# Altium PCB LED_Driver_48.PcbDoc
Units mm, origin at the board's own origin, x right, y up, seen from the top; angles counter-clockwise.
Board outline 96.65 x 50.67 mm, 2 copper layers (Top Layer, Bottom Layer); 60 components, 67 nets, 266 pads, 43 vias.
Unrouted connection lines stored in the file: 3.
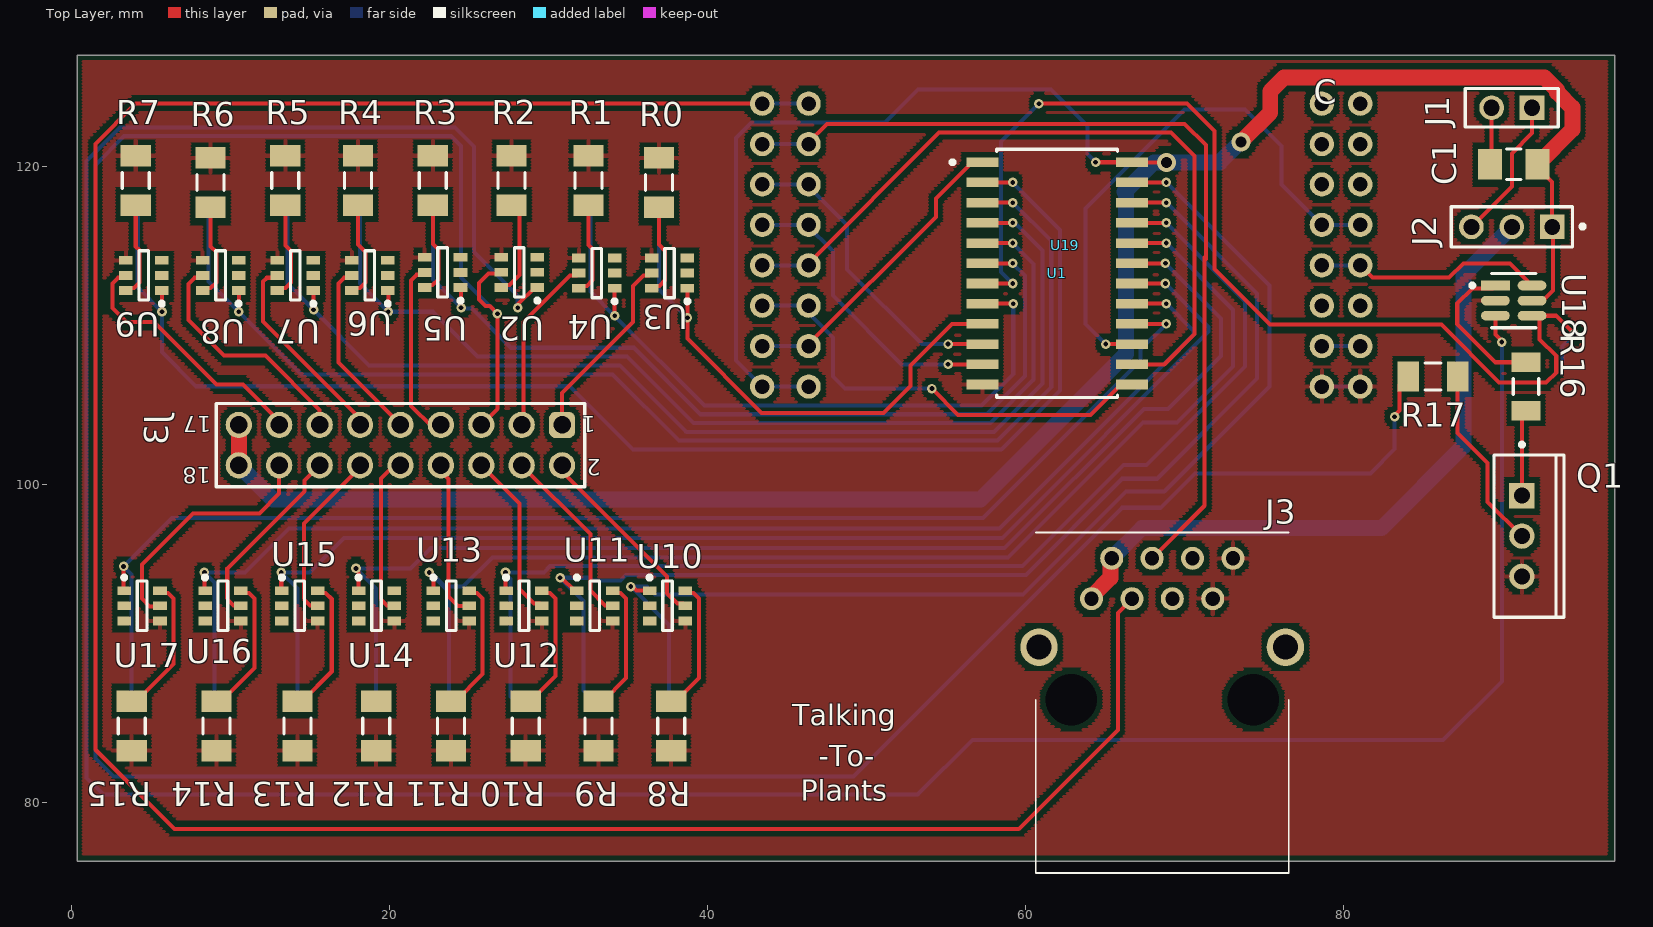
[diagram p0: Top Layer view]
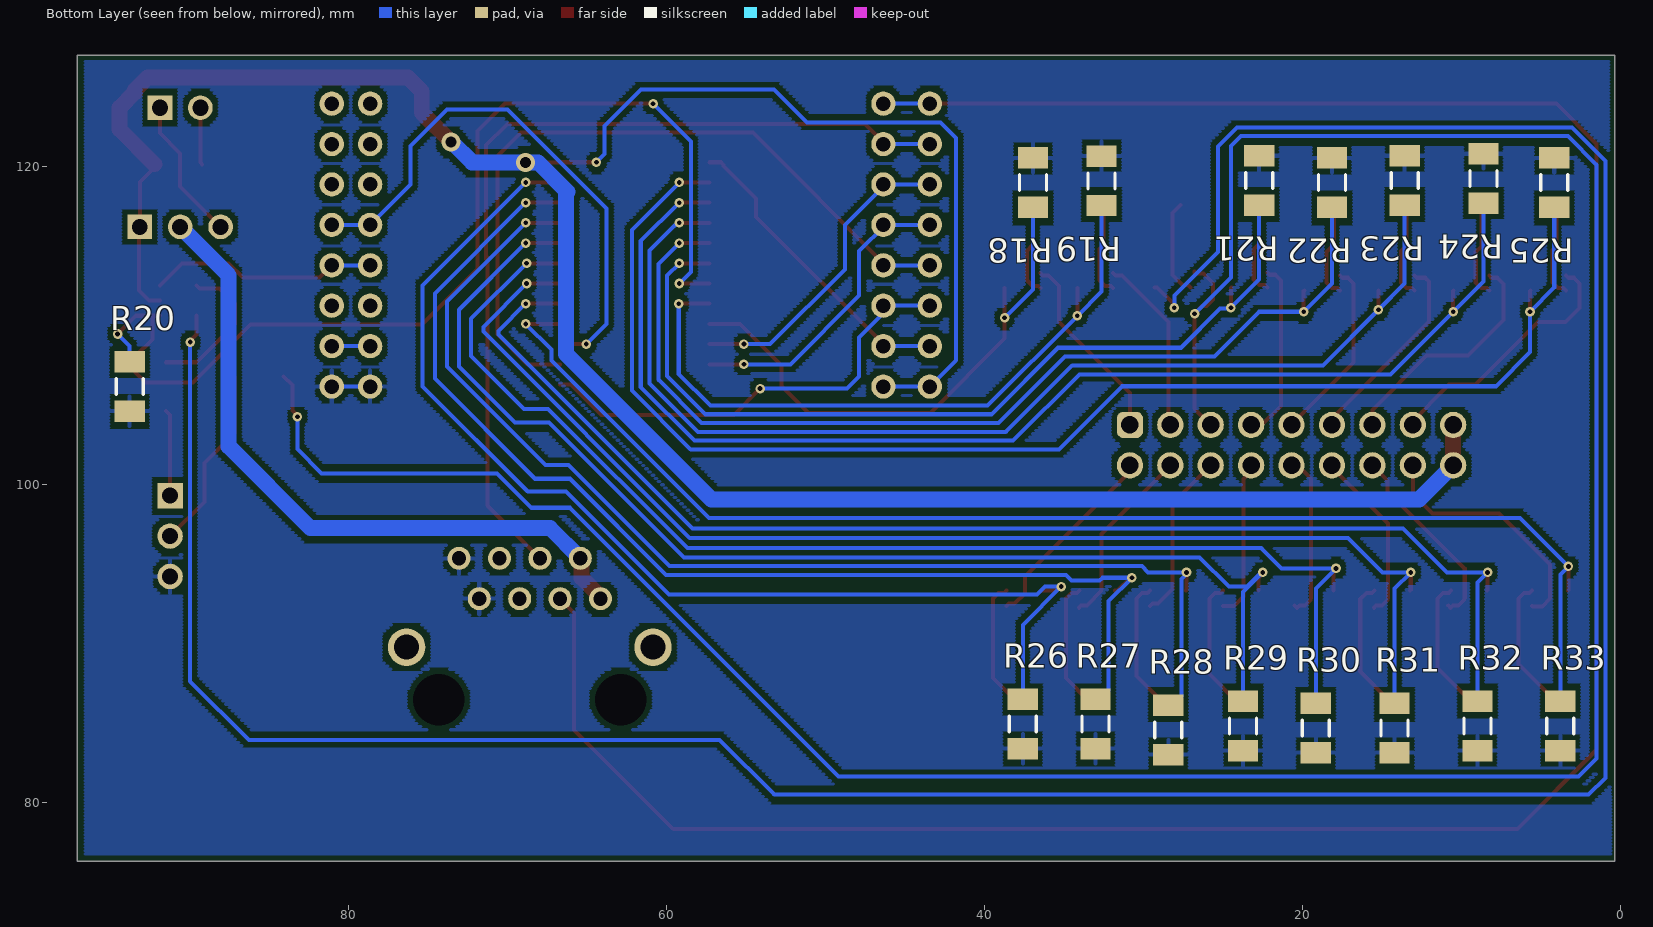
[diagram p1: Bottom Layer view, seen from below]

## Layer stack, top to bottom
Top Solder: solder mask 0.0102, Solder Resist, Dk 3.5
Top Layer: signal copper 0.0356
Dielectric 1: dielectric 0.32, FR-4, Dk 4.8
Bottom Layer: signal copper 0.0356
Bottom Solder: solder mask 0.0102, Solder Resist, Dk 3.5

## Board outline
0.381,76.327 97.028,76.327 97.028,127 0.381,127

## Design rules (kind name [scope] priority, off if disabled: settings)
Clearance [All] p1: gap=0.3 ignorepadtopadclearanceinfootprint=FALSE
ComponentClearance [All] p1: gap=0.254 collisioncheckmode=3 verticalgap=0 showdistances=FALSE donotcheckwithout3dbody=TRUE
PolygonConnect [All] p1: connectstyle=Relief reliefconductorwidth=0.254 reliefentries=4 polygonreliefangle="90 Angle" airgapwidth=0.254
RoutingVias [All] p1: holewidth=0.711 width=1.27 viastyle="Through Hole" minholewidth=0.711 minwidth=1.27 maxholewidth=0.711 maxwidth=1.27
SolderMaskExpansion [All] p1: expansion=0.102 istentingtop=FALSE
Width [All] p1: maxlimit=1 minlimit=0.254 preferedwidth=0.254
29 further rules are at their usual default settings.

## Components (designator, comment, footprint, x,y, rotation, side; value= is the part's Value field where it differs from the comment)
C "OpenMV H7 Headers" "OPENMV H7" 62.738,115.062 r0 top
C1 "1206YC105KAT2A" FP-1206-L_3_2_0_2-W_1_6_0-IPC_A 90.678,120.142 r180 top
J1 "SSQ-102-01-G-S" SMTC-SSQ-102-01-X-S 91.821,123.698 r180 top
J2 "90120-0763" FP-90120-0763-MFG 90.551,116.205 r180 top
J3 "MTC-8810SB" MTC8810SB 64.135,92.837 r0 top
J3 "61301821121" 61301821121 20.701,102.489 r180 top
Q1 "SPP20N60C3" INF-PG-TO220-3-1 91.186,96.774 r0 top
R0 "15R 5% 1206(3216)" RESC1206(3216)_M 36.957,118.999 r90 top value="15.00 Ohm"
R1 "15R 5% 1206(3216)" RESC1206(3216)_M 32.512,119.126 r90 top value="15.00 Ohm"
R2 "15R 5% 1206(3216)" RESC1206(3216)_M 27.686,119.126 r90 top value="15.00 Ohm"
R3 "15R 5% 1206(3216)" RESC1206(3216)_M 22.733,119.126 r90 top value="15.00 Ohm"
R4 "15R 5% 1206(3216)" RESC1206(3216)_M 18.034,119.126 r90 top value="15.00 Ohm"
R5 "15R 5% 1206(3216)" RESC1206(3216)_M 13.462,119.126 r90 top value="15.00 Ohm"
R6 "15R 5% 1206(3216)" RESC1206(3216)_M 8.763,118.999 r90 top value="15.00 Ohm"
R7 "15R 5% 1206(3216)" RESC1206(3216)_M 4.064,119.126 r90 top value="15.00 Ohm"
R8 "15R 5% 1206(3216)" RESC1206(3216)_M 37.719,84.836 r270 top value="15.00 Ohm"
R9 "15R 5% 1206(3216)" RESC1206(3216)_M 33.147,84.836 r270 top value="15.00 Ohm"
R10 "15R 5% 1206(3216)" RESC1206(3216)_M 28.575,84.836 r270 top value="15.00 Ohm"
R11 "15R 5% 1206(3216)" RESC1206(3216)_M 23.876,84.836 r270 top value="15.00 Ohm"
R12 "15R 5% 1206(3216)" RESC1206(3216)_M 19.177,84.836 r270 top value="15.00 Ohm"
R13 "15R 5% 1206(3216)" RESC1206(3216)_M 14.224,84.836 r270 top value="15.00 Ohm"
R14 "15R 5% 1206(3216)" RESC1206(3216)_M 9.144,84.836 r270 top value="15.00 Ohm"
R15 "15R 5% 1206(3216)" RESC1206(3216)_M 3.81,84.836 r270 top value="15.00 Ohm"
R16 "RC1206FR-07100RL" RESC3116X65X40ML10T20 91.44,106.172 r270 top
R17 "18R 1% 1206(3216)" RESC1206(3216)_M 85.598,106.807 r0 top value="18.00 Ohm"
R18 "18R 1% 1206(3216)" RESC1206(3216)_M 36.957,118.999 r270 bottom value="18.00 Ohm"
R19 "18R 1% 1206(3216)" RESC1206(3216)_M 32.639,119.1 r270 bottom value="18.00 Ohm"
R20 "18R 1% 1206(3216)" RESC1206(3216)_M 93.726,106.172 r90 bottom value="18.00 Ohm"
R21 "18R 1% 1206(3216)" RESC1206(3216)_M 22.733,119.126 r270 bottom value="18.00 Ohm"
R22 "18R 1% 1206(3216)" RESC1206(3216)_M 18.161,118.999 r270 bottom value="18.00 Ohm"
R23 "18R 1% 1206(3216)" RESC1206(3216)_M 13.589,119.126 r270 bottom value="18.00 Ohm"
R24 "18R 1% 1206(3216)" RESC1206(3216)_M 8.636,119.253 r270 bottom value="18.00 Ohm"
R25 "18R 1% 1206(3216)" RESC1206(3216)_M 4.191,118.999 r270 bottom value="18.00 Ohm"
R26 "18R 1% 1206(3216)" RESC1206(3216)_M 37.592,84.963 r90 bottom value="18.00 Ohm"
R27 "18R 1% 1206(3216)" RESC1206(3216)_M 33.02,84.963 r90 bottom value="18.00 Ohm"
R28 "18R 1% 1206(3216)" RESC1206(3216)_M 28.448,84.582 r90 bottom value="18.00 Ohm"
R29 "18R 1% 1206(3216)" RESC1206(3216)_M 23.749,84.836 r90 bottom value="18.00 Ohm"
R30 "18R 1% 1206(3216)" RESC1206(3216)_M 19.177,84.709 r90 bottom value="18.00 Ohm"
R31 "18R 1% 1206(3216)" RESC1206(3216)_M 14.224,84.709 r90 bottom value="18.00 Ohm"
R32 "18R 1% 1206(3216)" RESC1206(3216)_M 9.017,84.836 r90 bottom value="18.00 Ohm"
R33 "18R 1% 1206(3216)" RESC1206(3216)_M 3.81,84.836 r90 bottom value="18.00 Ohm"
U1 "CD74HC4067M96" FP-DW0024A-MFG 61.975,113.284 r0 top
U2 "BCR420U" INF-SC74_N 28.176,113.35 r180 top
U3 "BCR420U" INF-SC74_N 37.611,113.304 r180 top
U4 "BCR420U" INF-SC74_N 33.039,113.304 r180 top
U5 "BCR420U" INF-SC74_N 23.35,113.345 r180 top
U6 "BCR420U" INF-SC74_N 18.778,113.157 r180 top
U7 "BCR420U" INF-SC74_N 14.097,113.157 r180 top
U8 "BCR420U" INF-SC74_N 9.398,113.157 r180 top
U9 "BCR420U" INF-SC74_N 4.572,113.157 r180 top
U10 "BCR420U" INF-SC74_N 37.483,92.39 r0 top
U11 "BCR420U" INF-SC74_N 32.911,92.39 r0 top
U12 "BCR420U" INF-SC74_N 28.466,92.39 r0 top
U13 "BCR420U" INF-SC74_N 23.894,92.39 r0 top
U14 "BCR420U" INF-SC74_N 19.195,92.39 r0 top
U15 "BCR420U" INF-SC74_N 14.369,92.39 r0 top
U16 "BCR420U" INF-SC74_N 9.543,92.39 r0 top
U17 "BCR420U" INF-SC74_N 4.463,92.39 r0 top
U18 "SN74LVC1G3157DBVR" FP-DBV0006A-IPC_A 90.671,111.572 r0 top
U19 "OpenMV_M7 (Shield)" OPENMV_M7(32.48MM) 78.613,123.952 r0 top (schematic designator U1)

## Footprints (in the part's own frame and the unit in brackets; to place one, negate y for a bottom-side part, rotate by r counter-clockwise, add the part's x,y. Pads: shape width x height; smd on the part's side, far side on the other; paste and mask are expansions set on the pad)
61301821121 [mm] "Pin Header, pitch 2.54 mm, THT, Vertical, dual row, 18p"
  rrect50% 1.65x1.65 hole 1.1: 1(-10.16,-1.27)
  round 1.65 hole 1.1: 2(-10.16,1.27) 3(-7.62,-1.27) 4(-7.62,1.27) 5(-5.08,-1.27) 6(-5.08,1.27) 7(-2.54,-1.27) 8(-2.54,1.27) 9(0,-1.27) 10(0,1.27) 11(2.54,-1.27) 12(2.54,1.27) 13(5.08,-1.27) 14(5.08,1.27) 15(7.62,-1.27) 16(7.62,1.27) 17(10.16,-1.27) 18(10.16,1.27)
  silkscreen extent -11.58,-2.62 11.58,2.62, body extent -11.43,-2.54 11.43,2.54, height 8.59
FP-1206-L_3_2_0_2-W_1_6_0-IPC_A [mm]
  rect 1.505x1.906 smd paste+0 mask+0: 1(-1.501,0) 2(1.501,0)
  silkscreen extent -0.45,-0.95 0.45,0.95, body extent -2.75,-1.45 2.75,1.45, height 0.25
FP-90120-0763-MFG [mm]
  rect 1.55x1.55 hole 1 paste-1000 mask+0: 1(-2.54,0)
  round 1.55 hole 1 paste-1000 mask+0: 2(0,0) 3(2.54,0)
  silkscreen extent -4.57,-1.27 3.81,1.27, body extent -3.91,-1.37 3.91,1.37, height 0.25
FP-DBV0006A-IPC_A [mm]
  rect 1.805x0.61 smd paste+0 mask+0: 1(-1.15,0.95)
  rrect100% 1.805x0.61 smd paste+0 mask+0: 2(-1.15,0) 3(-1.15,-0.95) 4(1.15,-0.95) 5(1.15,0) 6(1.15,0.95)
  silkscreen extent -2.73,-1.7 1.4,1.7, body extent -2.55,-1.95 2.55,1.95, height 0.25
FP-DW0024A-MFG [mm]
  rect 2x0.6 smd paste-1000 mask+0: 1(-4.7,6.985) 2(-4.7,5.715) 3(-4.7,4.445) 4(-4.7,3.175) 5(-4.7,1.905) 6(-4.7,0.635) 7(-4.7,-0.635) 8(-4.7,-1.905) 9(-4.7,-3.175) 10(-4.7,-4.445) 11(-4.7,-5.715) 12(-4.7,-6.985) 13(4.7,-6.985) 14(4.7,-5.715) 15(4.7,-4.445) 16(4.7,-3.175) 17(4.7,-1.905) 18(4.7,-0.635) 19(4.7,0.635) 20(4.7,1.905) 21(4.7,3.175) 22(4.7,4.445) 23(4.7,5.715) 24(4.7,6.985)
  silkscreen extent -6.7,-7.8 3.8,7.8, body extent -5.8,-7.98 5.8,7.97, height 0.25
INF-PG-TO220-3-1 [mm] "FM, 3-Leads, Body 10x4.4mm, Pitch 2.54mm"
  rect 1.6x1.6 hole 1: 1(0,2.54)
  round 1.6 hole 1: 2(0,0) 3(0,-2.54)
  silkscreen extent -1.75,-5.1 2.65,5.87, body extent -1.75,-5.1 2.65,5.1, height 20.7
INF-SC74_N [mm] "SOT23, 6-Leads, Body 2.9x1.6mm, Pitch 0.95mm, IPC Medium Density"
  rect 0.85x0.55 smd: 1(-1.125,0.95) 2(-1.125,0) 3(-1.125,-0.95) 4(1.125,-0.95) 5(1.125,0) 6(1.125,0.95)
  silkscreen extent -1.25,-1.55 0.3,1.9, body extent -0.85,-1.55 0.85,1.55, height 1.1
MTC8810SB [mm]
  round 1.446 hole 0.89: 1(0,0) 2(1.27,2.54) 3(2.54,0) 4(3.81,2.54) 5(5.08,0) 6(6.35,2.54) 7(7.62,0) 8(8.89,2.54)
  round 1.625 hole 3.25 unplated: MH1(-1.27,-6.35) MH2(10.16,-6.35)
  round 2.355 hole 1.57: MH3(-3.3,-3.05) MH4(12.19,-3.05)
  silkscreen extent -3.5,-17.24 12.39,4.16, body extent -3.99,-17.24 12.87,4.16, height 13.55
"OPENMV H7" [mil]
  round 60 hole 36: 1(-760,350) 2(-760,250) 3(-760,150) 4(-760,50) 5(-760,-50) 6(-760,-150) 7(-760,-250) 8(-760,-350) 9(720,350) 10(720,250) 11(720,150) 12(720,50) 13(720,-50) 14(720,-150) 15(720,-250) 16(720,-350)
OPENMV_M7(32.48MM) [mil]
  round 60 hole 36: 1(0,0) 2(0,-100) 3(0,-200) 4(0,-300) 5(0,-400) 6(0,-500) 7(0,-600) 8(0,-700) 9(-1270,0) 10(-1270,-100) 11(-1270,-200) 12(-1270,-300) 13(-1270,-400) 14(-1270,-500) 15(-1270,-600) 16(-1270,-700)
RESC1206(3216)_M [mm] "Chip Resistor, Body 3.2x1.6mm, IPC Low Density"
  rect 1.35x1.9 smd: 1(-1.55,0) 2(1.55,0)
  silkscreen extent -0.5,-0.85 0.5,0.85, body extent -1.67,-0.87 1.67,0.87, height 0.75
RESC3116X65X40ML10T20 [mm] "Chip Resistor, 2-Leads, Body 3.10x1.60mm, IPC Low Density"
  rect 1.25x1.8 smd: 1(-1.525,0) 2(1.525,0)
  silkscreen extent -0.5,-0.8 0.5,0.8, body extent -1.6,-0.85 1.6,0.85, height 0.65
SMTC-SSQ-102-01-X-S [mm] "SQ Post Socket, 1x2 Pins, Vertical, 2.54mm Pitch, Female"
  rect 1.55x1.55 hole 1.02: 1(0,0)
  round 1.55 hole 1.02: 2(2.54,0)
  silkscreen extent -1.65,-1.21 4.19,1.21, body extent -1.52,-1.21 4.06,1.21, height 8.51

## Part data
C1: library part CMP-04427-000085-1, "General Purpose Ceramic Capacitor, 1206, 1uF, 10%, X7R, 15%, 16V", Capacitance=1uF, Case Code (Imperial)=1206, Case Code (Metric)=3216, Dielectric=X7R, Dielectric Material=Ceramic, Insulation Resistance=100GR, Max Operating Temperature=125°C, Min Operating Temperature=-55°C, Package Quantity=3000, Tolerance=10%, Voltage=16V, Case/Package=1206, Construction=Flat, Depth=1.6mm, Dissipation Factor=3.5%, Height=1.27mm, Lead Free="Lead Free", Length=3.2mm, Mount="Surface Mount", Number of Pins=2, Packaging="Tape and Reel", Radiation Hardening=No, REACH SVHC="No SVHC", RoHS Compliant=Yes, Series=1206, Termination=SMD/SMT, Thickness=0.05inch, Voltage Rating=16V, Voltage Rating (DC)=16V, Weight=0.000571oz, Width=1.6mm
J1: library part CMP-1023-00275-1, "SQ Post Socket, Through-hole, Vertical, -55 to 125 degC, 2.54 mm Pitch, 2-Pin, Female, RoHS", Manufacturer=Samtec, Temperature Range="-55 to 125 degC", ComponentLink1Description="Manufacturer URL", ComponentLink1URL=http://www.samtec.com, ComponentLink2Description=Datasheet, ComponentLink2URL=http://www.samtec.com/documents/webfiles/pdf/SSQ_TH.PDF, ComponentLink3Description="Package Specification", ComponentLink3URL=http://www.samtec.com/documents/webfiles/cpdf/SSQ-1XX-XX-XXX-X-XX-XXX-XX-X-MKT.pdf, DatasheetVersion=F-214, Mounting Technology=Through-hole, Orientation=Vertical, PackageDescription="Assembly, Socket Strip .025[0.64] SQ Tail", PackageReference=SSQ-102-01-X-S, PackageVersion="BD, 6/1987", PartNumber=SSQ-102-01-G-S, Pitch="2.54 mm", RoHS=True
J2: library part CMP-04776-000084-1, "CONN HEADER VERT 3POS 2.54MM", Current Rating=3A, Manufacturer=Molex, Temperature="-55°C to +125°C", Temperature Range High=+125°C, Temperature Range Low=-55°C, Voltage Rating=350V, Automotive=No, Category=Conn, ComponentLink2Description=Datasheet, ComponentLink2URL=https://www.molex.com/webdocs/datasheets/pdf/en-us/0901200763_PCB_HEADERS.pdf, Conn Gender=Male, Conn Orientation=Vertical, Contact Material=Gold,Nickel, Device Class L1=Connectors, Device Class L2="Headers and Wire Housings", Device Class L3=unset, Digikey Description="CONN HEADER VERT 3POS 2.54MM", Footprint Url=https://www.molex.com/pdm_docs/sd/901200763_sd.pdf, Height=5.8mm, Lead Free=Yes, Manufacturer Part Number=90120-0763, Mouser Description="Board-To-Board Connector, C-Grid III 90120 Series, Through Hole, Header, 3, 2.54 mm", Number of contacts=3, Number Of Rows=1, Octopart=https://octopart.com/90120-0763-molex-655433, Package=90120-0763, Pitch=2.54mm, RoHS=TRUE
J3: "Connector", Manufacturer_Name="RS Components", RS Part Number=3316443, Height=13.45mm, Manufacturer_Part_Number=MTC-8810SB, RS Price/Stock=https://uk.rs-online.com/web/p/products/3316443
J3: library part CMP-1502-01101-2, Color=Black, Contact Resistance=20mΩ, Current Rating=3A, Operating Supply Voltage=250V, Connector Type="Male Pin", Contact Material=Copper, Contact Mating Length=5.9944mm, Contact Plating=Gold, Gender=Male, Lead Pitch=2.54mm, Mount="Through Hole", NexarPartId=32855553, Number of contacts=18, Number of Pins=18, Number of Positions=18, Number Of Rows=2, Orientation=Vertical, Packaging=Bulk, Pitch=2.54mm, REACH SVHC=Unknown, RoHS=Compliant, Row Spacing=2.54mm, Termination=Solder
Q1: library part CMP-1164-00011-1, "N-Channel CoolMOS Power-Transistor, 600 V VDS, 20.7 A ID, -55 to 150 degC, PG-TO220-3-1, Tube, Green", Manufacturer=Infineon, ComponentLink1Description="Manufacturer URL", ComponentLink1URL=http://www.infineon.com/, ComponentLink2Description=Datasheet, ComponentLink2URL=http://www.infineon.com/dgdl/SPP_I_A20N60C3_Rev3.2.pdf?folderId=db3a304412b407950112b408e8c90004&fileId=db3a304412b407950112b42d841f488f, ComponentLink3Description="Package Specification", ComponentLink3URL=http://www.infineon.com/dgdl/BTS117_DS_14.pdf?folderId=db3a30431400ef68011421b54e2e0564&fileId=db3a30433a747525013abff8302d549c&location=en.Products.Automotive_ICs.Smart_High-_and_Low-Side_Switches.HITFET___TEMPFET__-_Smart_Low-Side_Switches.DATASHEET.BTS1, DatasheetVersion="Rev. 3.2", Green=TRUE, ID (max)="20.7Â A", IDpuls (max)="62.1Â A", Mounting Technology="Through Hole", PackageDescription="3-Pin Plastic (Green) Transistor Single Outline Package, 10 x 9.25 mm Body, 2.54 mm Pitch", PackageReference=PG-TO220-3-1, PackageVersion=Jul-12, Packing=Tube, PartNumber=SPP20N60C3, Polarity=N, Ptot (max)="208Â W", QG="87Â nC", RDS (on) (max)="190Â mOhm", Rth="0.6Â K/W", RthJA (max)="62Â K/W", RthJC (max)="0.6Â K/W", Technology="CoolMOS C3", VDS (max)="600Â V", VGS(th) (max)="3.9Â V", VGS(th) (min)="2.1Â V"
R0 R1 R2 R3 R4 R5 R6 R7 R8 R9 R10 R11 R12 R13 R14 R15: library part CMP-1014-00030-1, "15R 0.25W 5% 1206 (3216 Metric)  SMD", Case-EIA=1206, Case-Metric=3216, Power="0.25 W", Tolerance="5 %", Technology=SMT
R16: library part CMP-2100-03675-1, "Chip Resistor, 100 Ohm, +/- 1%, 0.25 W, -55 to 155 degC, 1206 (3216 Metric), RoHS, Tape and Reel", Case Code (Imperial)=1206, Case Code (Metric)=3216, Manufacturer=Yageo, Max Operating Temperature=155degC, Min Operating Temperature=-55degC, Package Description="2-Pin Surface Mount Device, Body 3.1 x 1.6 mm", Package Quantity=5000, Package Reference=1206.0, Power Rating=250mW, Resistance=100Ohm, Temperature Coefficient=100ppm/degreesC, Tolerance=1%, Voltage Rating=200V, Case/Package=1206, Composition=ThickFilm, Datasheet URL=http://www.yageo.com/NewPortal/yageodocoutput?fileName=/pdf/R-Chip/PYu-RC_Group_51_RoHS_L_5.pdf, Datasheet Version="Rev. 5, 10/2016", Depth=1.6mm, Height=0.55mm, Lead Free=LeadFree, Length=3.1mm, Manufacturer URL=http://www.yageo.com/, Packaging=TapeandReel, REACH SVHC=Unknown, RoHSCompliant=true, Termination=SMD/SMT, Width=1.6mm
R17 R18 R19 R20 R21 R22 R23 R24 R25 R26 R27 R28 R29 R30 R31 R32 R33: library part CMP-1014-00311-1, "18R 0.25W 1% 1206 (3216 Metric)  SMD", Case-EIA=1206, Case-Metric=3216, Power="0.25 W", Tolerance="1 %", Technology=SMT
U1: library part CMP-04901-000007-1, "IC MUX/DEMUX 1X16 24SOIC", Ambient Temperature Range High=+125°C, Ambient Temperature Range Low=-55°C, Manufacturer="Texas Instruments", Max Junction Temp=+150°C, Max Supply Voltage=6V, Min Supply Voltage=2V, Package=DW0024A, Quiescent Current=8uA, Temperature="-55°C to +125°C", Automotive=No, Category=IC, ComponentLink2Description=Datasheet, ComponentLink2URL=http://www.ti.com/lit/ds/symlink/cd74hc4067.pdf, Device Class L1="Integrated Circuits (ICs)", Device Class L2="Logic ICs", Device Class L3=Multiplexers, Digikey Description="IC MUX/DEMUX 1X16 24SOIC", Height=2.65mm, Ipc Land Pattern Name=SOIC127P1030X265-24, Lead Free=Yes, Logic Function Desc=Non-Inverting, Manufacturer Part Number=CD74HC4067M96, Mouser Description="Multiplexer Switch ICs Hi-Spd CMOS 16Ch Anl Mltplxr/Demltplxr", Number of Circuits=1, Number Of Inputs=16, Number of Outputs=1, Octopart=https://octopart.com/cd74hc4067m96-texas+instruments-722802, Propagation Delay=6ns, RoHS=TRUE, Standoff Height=0.1mm, Temperature Range High=+125°C, Temperature Range Low=-55°C
U2 U3 U4 U5 U6 U7 U8 U9 U10 U11 U12 U13 U14 U15 U16 U17: library part CMP-1139-00012-1, "LED Driver, 1.4 to 40 V, SC74, Reel, Pb-free", Manufacturer=Infineon, ComponentLink1Description="Manufacturer URL", ComponentLink1URL=http://www.infineon.com/, ComponentLink2Description=Datasheet, ComponentLink2URL=http://www.infineon.com/dgdl/Infineon-BCR420U-BCR421U-LED-Driver-Rev2.0.pdf?folderId=db3a30431f848401011fcbf2ab4c04c4&fileId=db3a304324fc7f9a01252046582f4302&location=en.Products.LED_Drivers___Lighting_ICs.LED_Driver_for_Outdoor_Lighting___Indoor_Lighting., ComponentLink3Description="Package Specification", ComponentLink3URL=http://www.infineon.com/dgdl/SC74-Package_Overview.pdf?folderId=db3a30431936bc4b01194dec844f40d9&fileId=db3a30431936bc4b01195175d46e3ab3, DatasheetVersion="Revision 2.0", Green=TRUE, Mounting Technology="Surface Mount", PackageDescription="6-Pin Semiconductor Package, 2.9 x 1.6 mm Body, 0.95 mm Pitch", PackageReference=SC74, PackageVersion=Apr-08, Packing=Reel, PartNumber=BCR420U, Type=Linear, VS (max)="40 V", VS (min)="1.4 V"
U18: library part CMP-0859-00203-4, "IC SWITCH SPDT SOT23-6", Case/Package=SOT-23, High Level Output Current=128mA, Max Operating Temperature=125°C, Max Supply Current=10uA, Max Supply Voltage=5.5V, Min Operating Temperature=-40°C, Min Supply Voltage=1.65V, On-State Resistance=15R, Operating Supply Current=1uA, Package Quantity=3000, Bandwidth=300MHz, Contact Plating=Gold, Height=1.3mm, Lead Free="Lead Free", Length=3.05mm, Low Level Output Current=128mA, Mount="Surface Mount", Nominal Supply Current=10uA, Number of Bits=1, Number Of Channels=1, Number Of Inputs=1, Number of Outputs=2, Number of Pins=6, Packaging="Tape and Reel", Polarity=Non-Inverting, Propagation Delay=300ps, Radiation Hardening=No, REACH SVHC="No SVHC", RoHS Compliant=Yes, Series=74LVC, Supply Current=10uA, Supply Type=Single, Termination=SMD/SMT, Throw Configuration=SPDT, Turn-Off Delay Time=3.8ns, Turn-On Delay Time=5.7ns, Weight=0.000229oz, Width=1.75mm

## Via types
v1: diameter 0.6, hole 0.3, Top Layer to Bottom Layer, tented both sides, 25 vias
v2: diameter 0.6, hole 0.3, Top Layer to Bottom Layer, 16 vias
v3: diameter 1.2, hole 0.7, Top Layer to Bottom Layer, tented both sides, 2 vias

## Nets (pads, with @x,y where several pads share a name; then routed paths per layer and width w, separated by ;. In a path a pad name is that pad's centre, name@x,y a point inside that pad or via, vN(x,y) a via of type N, cw(c..) or ccw(c..) an arc to the next point about the centre after c; other vN are vias at no path point)
GND: C.16 J3.7@71.755,92.837 J3.8@73.025,95.377 Q1.3 R0.2 R1.2 R2.2 R3.2 R4.2 R5.2 R6.2 R7.2 R8.2 R9.2 R10.2 R11.2 R12.2 R13.2 R14.2 R15.2 R18.1 R19.1 R20.1 R21.1 R22.1 R23.1 R24.1 R25.1 R26.1 R27.1 R28.1 R29.1 R30.1 R31.1 R32.1 R33.1 U1.12 U2.4 U3.4 U4.4 U5.4 U6.4 U7.4 U8.4 U9.4 U10.4 U11.4 U12.4 U13.4 U14.4 U15.4 U16.4 U17.4 U18.2 U19.8 | length 2.5
  Bottom Layer w0.254: U19.8@78.486,106.172 C.16
NetC1_1: C1.1 C.8 J2.1 J3.17 J3.18 U1.24 U18.5 U19.16 | length 170.7
  Top Layer w0.254: v1(64.389,120.269) U1.24 66.678,120.266 68.837,120.266 v3(68.84,120.263) ; U18.5 92.504,111.572 93.151,112.219 93.151,116.145 J2.1 93.091,119.029 92.179,119.941 C1.1
  Top Layer w1: J3.18 J3.17 ; v3(73.533,121.539) 73.533,121.549 75.366,123.382 75.366,124.732 76.238,125.603 92.597,125.603 93.396,124.804 93.396,124.663 94.361,123.698 94.361,122.324 C1.1
  Bottom Layer w0.254: U19.16@46.228,106.172 C.8 41.783,107.823 41.783,121.793 42.753,122.763 51.161,122.763 53.239,124.841 61.595,124.841 63.881,122.555 63.881,120.777 v1(64.389,120.269) ; v3(68.84,120.263) v3@68.846,120.269
  Bottom Layer w1: J3.18 12.7,99.06 57.15,99.06 66.294,108.204 66.294,118.342 66.219,118.416 68.066,120.263 v3(68.84,120.263) ; v3@68.846,120.269 68.852,120.263 72.203,120.263 73.479,121.539 v3(73.533,121.539)
NetC1_2: C1.2 J1.2 | length 3.6
  Top Layer w0.254: C1.2 89.281,120.246 J1.2
NetC_1: C.1 J3.3@66.675,92.837 U19.9 | length 161.4
  Top Layer w0.254: C.1 4.064,123.952 1.524,121.412 1.524,83.343 6.508,78.359 44.424,78.359 47.524,78.359 59.563,78.359 65.786,84.582 65.786,91.948 J3.3@66.675,92.837
  Bottom Layer w0.254: C.1 U19.9@46.228,123.952
NetC_2: C.2 J3.4@67.945,95.377 U19.10 | length 56.5
  Top Layer w0.254: U19.10@46.228,121.412 47.498,122.682 69.977,122.682 71.319,121.34 71.319,114.197 71.247,114.269 71.247,98.679 J3.4@67.945,95.377
  Bottom Layer w0.254: C.2 U19.10@46.228,121.412
NetC_3: C.3 U1.10 U19.11 | length 19.6
  Top Layer w0.254: v1(55.118,108.839) U1.10
  Bottom Layer w0.254: C.3 46.228,118.872 48.768,116.332 48.768,113.538 53.467,108.839 v1(55.118,108.839)
NetC_4: C.4 U1.11 U19.12 | length 19.1
  Top Layer w0.254: v1(55.118,107.569) U1.11
  Bottom Layer w0.254: C.4 46.228,116.332 47.879,114.681 47.879,111.887 52.197,107.569 v1(55.118,107.569)
NetC_5: C.5 U1.14 U19.13 | length 47.1
  Top Layer w0.254: U19.13@46.228,113.792 54.564,122.128 69.134,122.128 70.612,120.65 70.612,109.474 68.707,107.569 U1.14
  Bottom Layer w0.254: C.5 U19.13@46.228,113.792
NetC_6: C.6 U1.13 U19.14 | length 28.5
  Top Layer w0.254: v1(54.102,106.045) 55.753,104.394 64.07,104.394 65.975,106.299 U1.13
  Bottom Layer w0.254: C.6 46.228,111.252 46.228,110.908 47.879,109.257 47.879,106.807 48.641,106.045 v1(54.102,106.045)
NetC_7: C.7 U1.1 U19.15 | length 19.3
  Top Layer w0.254: U19.15@46.228,108.712 54.356,116.84 54.356,117.984 56.402,120.03 56.402,120.096 56.575,120.269 U1.1
  Bottom Layer w0.254: C.7 U19.15@46.228,108.712
NetC_12: C.12 U1.15 U19.4 | length 34.9
  Top Layer w0.254: v2(65.024,108.839) U1.15
  Bottom Layer w0.254: v2(65.024,108.839) 63.754,110.109 63.754,117.348 69.977,123.571 73.787,123.571 76.078,121.28 76.078,118.867 U19.4 C.12
NetC_13: C.13 U18.6 U19.5 | length 14.6
  Top Layer w0.254: C.13 81.788,113.03 86.614,113.03 87.503,113.919 90.424,113.919 U18.6
  Bottom Layer w0.254: U19.5@78.486,113.792 C.13
NetC_15: C.15 U19.7 | length 2.5
  Bottom Layer w0.254: U19.7@78.486,108.712 C.15
NetJ1_1: J1.1 J2.3 | length 9.1
  Top Layer w0.254: J2.3 90.551,118.745 90.551,120.824 91.821,122.094 J1.1
NetJ2_2: J2.2 J3.1@64.135,92.837 J3.2@65.405,95.377 | length 43.1
  Top Layer w1: J3.1@64.135,92.837 64.135,92.958 65.32,94.142 65.32,95.292 J3.2@65.405,95.377
  Bottom Layer w1: J3.2@65.405,95.377 67.31,97.282 82.374,97.282 87.503,102.411 87.503,113.157 J2.2
NetJ3_1: J3.1@30.861,103.759 U3.5 | length 12.1
  Top Layer w0.254: J3.1@30.861,103.759 30.861,105.776 35.306,110.221 35.306,112.478 35.984,113.156 36.338,113.156 U3.5
NetJ3_2: J3.2@30.861,101.219 U10.5 | length 12.6
  Top Layer w0.254: J3.2@30.362,101.337 30.366,101.337 31.269,100.433 31.269,100.43 37.465,94.234 37.465,93.179 38.106,92.538 38.46,92.538 U10.5
NetJ3_3: J3.3@28.321,103.759 U4.5 | length 11.3
  Top Layer w0.254: J3.3@28.321,103.759 28.448,103.886 28.448,110.236 31.368,113.156 31.766,113.156 U4.5
NetJ3_4: J3.4@28.321,101.219 U11.5 | length 11.4
  Top Layer w0.254: J3.4@28.321,101.219 32.638,96.902 32.638,93.434 ; 32.674,93.312 33.57,92.416 33.924,92.416 U11.5@34.072,92.268
NetJ3_5: J3.5@25.781,103.759 R17.1 U2.5 | length 180
  Top Layer w0.254: J3.5@25.654,103.632 25.781,103.759 26.797,104.775 v2(26.797,110.744) 26.794,110.744 26.314,111.224 26.059,111.224 25.645,111.638 25.645,112.69 26.245,113.29 26.753,113.29 26.815,113.352 U2.5@26.815,113.411 ; v1(83.185,104.267) 83.185,104.361 83.5,104.676 83.5,106.259 R17.1
  Bottom Layer w0.254: v2(26.797,110.744) 24.511,113.03 24.511,121.285 23.891,121.905 3.318,121.905 1.524,120.111 1.524,82.804 2.667,81.661 49.17,81.661 66.061,98.552 68.474,98.552 70.633,100.711 81.661,100.711 83.185,102.235 v1(83.185,104.267)
NetJ3_6: J3.6@25.781,101.219 U12.5 | length 10.6
  Top Layer w0.254: J3.6@25.781,101.219 28.193,98.807 28.193,93.434 29.089,92.538 29.443,92.538 U12.5
NetJ3_7: J3.7@23.241,103.759 U5.5 | length 10.8
  Top Layer w0.254: U5.5 22.077,113.197 21.723,113.197 21.373,112.847 21.373,104.944 J3.7@22.701,103.616
NetJ3_8: J3.8@23.241,101.219 U13.5 | length 10.6
  Top Layer w0.254: J3.8@22.701,101.616 J3.8@23.17,101.147 ; J3.8@23.241,101.219 23.312,101.148 23.312,100.795 23.735,100.372 23.735,92.978 24.323,92.39 U13.5
NetJ3_9: J3.9 U6.5 | length 11.7
  Top Layer w0.254: U6.5 17.505,113.009 17.151,113.009 16.801,112.659 16.801,107.696 20.701,103.796 J3.9@20.701,103.616
NetJ3_10: J3.10 U14.5 | length 10.8
  Top Layer w0.254: 19.468,92.888 19.468,100.383 20.701,101.616 J3.10@20.701,101.36 ; 19.504,92.766 19.854,92.416 20.208,92.416 20.356,92.268 U14.5@20.504,92.416
NetJ3_11: J3.11 U7.5 | length 13
  Top Layer w0.254: U7.5 12.824,113.009 12.298,113.009 12.065,112.776 12.065,110.252 J3.11@18.701,103.616
NetJ3_12: J3.12 U15.5 | length 11.5
  Top Layer w0.254: 14.642,92.888 14.642,97.557 J3.12@18.701,101.616 ; 14.678,92.766 15.028,92.416 15.382,92.416 U15.5@15.53,92.268
NetJ3_13: J3.13 U8.5 | length 14.9
  Top Layer w0.254: U8.5 8.125,113.009 7.771,113.009 7.366,112.604 7.366,110.363 9.62,108.109 12.208,108.109 15.621,104.696 J3.13
NetJ3_14: J3.14 U16.5 | length 12.3
  Top Layer w0.254: 9.816,92.888 9.816,94.731 14.675,99.59 14.675,100.273 J3.14@15.805,101.403 ; 9.852,92.766 10.202,92.416 10.556,92.416 10.704,92.268 U16.5@10.852,92.416
NetJ3_15: J3.15 U9.5 | length 16.2
  Top Layer w0.254: U9.5 3.299,113.009 2.945,113.009 2.595,112.659 2.595,111.109 3.468,110.236 5.207,110.236 9.144,106.299 10.795,106.299 J3.15@13.208,103.886
NetJ3_16: J3.16 U17.5 | length 15.8
  Top Layer w0.254: U17.5 5.549,92.351 4.931,92.351 4.445,92.837 4.445,94.974 7.675,98.205 11.845,98.205 13.081,99.441 J3.16
NetQ1_1: Q1.1 R16.2 | length 5.4
  Top Layer w0.254: Q1.1 91.186,104.393 R16.2
NetQ1_2: Q1.2 R17.2 | length 11.7
  Top Layer w0.254: R17.2 87.148,103.26 89.031,101.377 89.031,98.929 Q1.2
NetR0_1: R0.1 U3.6 | length 5.8
  Top Layer w0.254: U3.6 36.634,112.502 36.988,112.502 37.338,112.852 37.338,114.706 36.957,115.087 R0.1
NetR1_1: R1.1 U4.6 | length 5.9
  Top Layer w0.254: U4.6 32.062,112.502 32.416,112.502 32.766,112.852 32.766,114.813 32.512,115.067 R1.1
NetR2_1: R2.1 U2.6 | length 6.1
  Top Layer w0.254: U2.6 27.199,112.548 27.553,112.548 28.194,113.189 28.194,117.068 R2.1
NetR3_1: R3.1 U5.6 | length 5.9
  Top Layer w0.254: U5.6 22.373,112.543 22.727,112.543 23.077,112.893 23.077,114.789 22.733,115.133 R3.1
NetR4_1: R4.1 U6.6 | length 6.1
  Top Layer w0.254: U6.6 17.801,112.355 18.155,112.355 18.505,112.705 18.505,114.631 18.034,115.102 R4.1
NetR5_1: R5.1 U7.6 | length 6.1
  Top Layer w0.254: U7.6 13.12,112.355 13.474,112.355 13.824,112.705 13.824,114.686 13.462,115.048 R5.1
NetR6_1: R6.1 U8.6 | length 6
  Top Layer w0.254: U8.6 8.421,112.355 8.775,112.355 9.125,112.705 9.125,114.622 8.763,114.984 R6.1
NetR7_1: R7.1 U9.6 | length 6
  Top Layer w0.254: U9.6 3.595,112.355 3.949,112.355 4.299,112.705 4.299,114.749 4.064,114.984 R7.1
NetR8_1: R8.1 U10.6 | length 8.4
  Top Layer w0.254: R8.1 37.994,86.386 39.46,87.852 39.46,92.842 39.11,93.192 38.756,93.192 U10.6
NetR9_1: R9.1 U11.6 | length 8.4
  Top Layer w0.254: R9.1 33.422,86.386 34.888,87.852 34.888,92.842 34.538,93.192 34.184,93.192 U11.6
NetR10_1: R10.1 U12.6 | length 8.4
  Top Layer w0.254: R10.1 28.85,86.386 30.443,87.979 30.443,92.842 30.093,93.192 29.739,93.192 U12.6
NetR11_1: R11.1 U13.6 | length 8.5
  Top Layer w0.254: R11.1 24.151,86.386 25.871,88.106 25.871,92.842 25.521,93.192 25.167,93.192 U13.6
NetR12_1: R12.1 U14.6
NetR13_1: R13.1 U15.6 | length 8.6
  Top Layer w0.254: R13.1 14.499,86.386 16.383,88.27 16.383,92.805 15.996,93.192 15.642,93.192 U15.6
NetR14_1: R14.1 U16.6 | length 8.7
  Top Layer w0.254: R14.1 9.419,86.386 11.52,88.487 11.52,92.842 11.17,93.192 10.816,93.192 U16.6
NetR15_1: R15.1 U17.6 | length 8.8
  Top Layer w0.254: R15.1 4.085,86.386 6.44,88.741 6.44,92.842 6.09,93.192 5.736,93.192 U17.6
NetR16_1: R16.1 U18.1 | length 9.5
  Top Layer w0.254: U18.1 89.342,112.344 88.087,112.344 87.122,111.379 87.122,110.109 89.534,107.697 R16.1
NetR18_2: R18.2 U1.9 U3.1 | length 34.4
  Top Layer w0.254: U3.1 38.736,109.189 43.403,104.522 51.055,104.522 52.746,106.213 52.746,107.495 55.36,110.109 U1.9
  Bottom Layer w0.254: R18.2 36.957,112.268 v2(38.735,110.49)
NetR19_2: R19.2 U1.8 U4.1 | length 43.9
  Top Layer w0.254: v2(34.163,110.617) 34.163,112.353 U4.1 ; U1.8 v1(59.217,111.379)
  Bottom Layer w0.254: R19.2 32.639,112.141 v2(34.163,110.617) 39.797,104.983 57.231,104.983 59.217,106.969 v1(59.217,111.379)
NetR20_2: R20.2 U1.7 U18.4 | length 68.9
  Top Layer w0.254: U1.7 v1(59.182,112.649) ; v2(60.833,123.952) 70.147,123.952 71.873,122.226 71.873,113.547 75.357,110.063 86.121,110.063 89.758,106.426 92.71,106.426 93.345,107.061 93.345,108.077 92.292,109.13 92.292,110.458 U18.4@92.127,110.622 ; U18.4 U18.4@92.127,110.622 ; v1(94.488,109.474) 93.34,110.622 U18.4@92.127,110.622
  Bottom Layer w0.254: v1(59.182,112.649) 58.455,113.376 58.455,121.574 v2(60.833,123.952) ; R20.2 93.726,108.712 v1(94.488,109.474)
NetR21_2: R21.2 U1.6 U5.1 | length 57
  Top Layer w0.254: U5.1 24.511,112.359 v2(24.511,111.125) ; U1.6 v1(59.182,113.919)
  Bottom Layer w0.254: R21.2 22.733,112.903 v2(24.511,111.125) 24.574,111.062 25.192,111.062 27.645,108.609 35.387,108.609 39.568,104.429 57.545,104.429 59.944,106.828 59.944,113.14 59.182,113.902 v1(59.182,113.919)
NetR22_2: R22.2 U1.5 U6.1 | length 64.3
  Top Layer w0.254: U6.1 19.939,112.171 v2(19.939,110.871) ; U1.5 v1(59.182,115.189)
  Bottom Layer w0.254: R22.2 18.161,112.649 v2(19.939,110.871) 22.733,110.871 25.549,108.055 34.947,108.055 39.127,103.875 57.774,103.875 60.498,106.599 60.498,113.873 v1(59.182,115.189)
NetR23_2: R23.2 U1.4 U7.1 | length 71.6
  Top Layer w0.254: U7.1 15.24,112.189 v2(15.24,110.998) ; U1.4 v1(59.182,116.459)
  Bottom Layer w0.254: R23.2 13.589,112.649 v2(15.24,110.998) 18.737,107.501 34.485,107.501 38.665,103.321 58.003,103.321 61.052,106.37 61.052,114.716 59.473,116.295 59.44,116.295 59.276,116.459 v1(59.182,116.459)
NetR24_2: R24.2 U1.3 U8.1 | length 79.3
  Top Layer w0.254: U8.1 10.541,112.189 v2(10.541,110.871) ; U1.3 v1(59.182,117.729)
  Bottom Layer w0.254: R24.2 8.636,112.776 v2(10.541,110.871) 14.478,106.934 34.036,106.934 38.203,102.767 58.233,102.767 61.606,106.14 61.606,115.305 v1(59.182,117.729)
NetR25_2: R25.2 U1.2 U9.1 | length 87.8
  Top Layer w0.254: U9.1 5.715,112.189 v2(5.715,110.871) ; U1.2 v1(59.182,118.999)
  Bottom Layer w0.254: R25.2 4.191,112.395 v2(5.715,110.871) 5.715,108.331 7.857,106.189 31.351,106.189 35.328,102.213 58.462,102.213 62.16,105.911 62.16,116.021 v1(59.182,118.999)
NetR26_2: R26.2 U1.23 U10.1 | length 72.8
  Top Layer w0.254: v1(35.179,93.599) 35.273,93.599 35.532,93.34 U10.1 ; U1.23 v1(68.834,118.999)
  Bottom Layer w0.254: R26.2 37.592,91.186 v1(35.179,93.599) 36.197,93.599 36.705,93.091 59.817,93.091 66.294,99.568 68.707,99.568 75.311,106.172 75.311,112.522 v1(68.834,118.999)
NetR27_2: R27.2 U1.22 U11.1 | length 74.9
  Top Layer w0.254: v1(30.734,94.153) 30.823,94.153 31.636,93.34 U11.1 ; U1.22 v1(68.834,117.729)
  Bottom Layer w0.254: R27.2 32.745,86.513 32.197,87.061 32.197,92.69 v1(30.734,94.153) 32.593,94.153 32.766,93.98 34.532,93.98 34.878,94.326 60.015,94.326 66.065,100.376 68.245,100.376 74.549,106.68 74.549,112.014 v1(68.834,117.729)
NetR28_2: R28.2 U1.21 U12.1 | length 75.2
  Top Layer w0.254: v2(27.305,94.488) 27.305,93.376 U12.1 ; U1.21 v1(68.834,116.459)
  Bottom Layer w0.254: R28.2 28.173,86.132 27.625,86.68 27.625,94.074 27.305,94.394 v2(27.305,94.488) 29.718,94.488 30.11,94.88 59.785,94.88 66.136,101.231 67.598,101.231 73.787,107.421 73.787,111.506 v1(68.834,116.459)
NetR29_2: R29.2 U1.20 U13.1 | length 78.1
  Top Layer w0.254: v2(22.514,94.488) 22.514,94.394 22.769,94.139 U13.1 ; U1.20 v1(68.834,115.189)
  Bottom Layer w0.254: R29.2 23.749,93.253 v2(22.514,94.488) 22.606,94.488 23.495,93.599 24.638,93.599 26.473,95.434 58.879,95.434 67.366,103.921 69.504,103.921 73.025,107.442 73.025,110.998 v1(68.834,115.189)
NetR30_2: R30.2 U1.19 U14.1 | length 79.7
  Top Layer w0.254: v2(17.907,94.742) 17.907,94.648 18.07,94.485 U14.1 ; U1.19 v1(68.777,113.919)
  Bottom Layer w0.254: R30.2 19.177,93.472 v2(17.907,94.742) 21.336,94.742 22.606,96.012 58.674,96.012 67.426,104.764 68.95,104.764 72.263,108.077 72.263,110.433 v1(68.777,113.919)
NetR31_2: R31.2 U1.18 U15.1 | length 80.6
  Top Layer w0.254: v2(13.208,94.488) 13.208,93.376 U15.1 ; U1.18 v1(68.777,112.649)
  Bottom Layer w0.254: R31.2 14.224,93.472 v2(13.208,94.488) 14.986,94.488 17.145,96.647 58.526,96.647 71.501,109.622 71.501,109.925 v1(68.777,112.649)
NetR32_2: R32.2 U1.17 U16.1 | length 82.8
  Top Layer w0.254: v2(8.382,94.488) 8.382,93.376 U16.1 ; U1.17@66.739,111.315 U1.17 v1(68.834,111.379)
  Bottom Layer w0.254: R32.2 9.017,93.853 v2(8.382,94.488) 10.922,94.488 13.692,97.258 58.353,97.258 70.549,109.454 70.549,109.664 v1(68.834,111.379)
NetR33_2: R33.2 U1.16 U17.1 | length 84.6
  Top Layer w0.254: v2(3.302,94.869) 3.302,93.376 U17.1 ; U1.16 v1(68.834,110.109)
  Bottom Layer w0.254: R33.2 3.81,94.361 v2(3.302,94.869) 6.35,97.917 57.318,97.917 67.221,107.82 67.221,108.496 v1(68.834,110.109)
NetU2_1: U2.1 U18.3 | length 193.1
  Top Layer w0.254: v1(28.067,111.125) 28.133,111.191 28.133,111.382 29.151,112.4 U2.1 ; U18.3 89.52,109.456 89.916,109.06 v1(89.916,108.966)
  Bottom Layer w0.254: v1(28.067,111.125) 28.067,111.887 25.332,114.622 25.332,121.248 24.12,122.459 3.089,122.459 0.97,120.34 0.97,81.58 2.032,80.518 53.213,80.518 56.642,83.947 86.222,83.947 89.923,87.648 89.923,108.959 v1(89.916,108.966)
pads on no net: C.9 C.10 C.11 C.14 J3.5@69.215,92.837 J3.6@70.485,95.377 J3.MH1 J3.MH2 J3.MH3 J3.MH4 U2.2 U2.3 U3.2 U3.3 U4.2 U4.3 U5.2 U5.3 U6.2 U6.3 U7.2 U7.3 U8.2 U8.3 U9.2 U9.3 U10.2 U10.3 U11.2 U11.3 U12.2 U12.3 U13.2 U13.3 U14.2 U14.3 U15.2 U15.3 U16.2 U16.3 U17.2 U17.3 U19.1 U19.2 U19.3 U19.6

## Polygon pours and split planes (outlines as drawn)
GND on Top Layer "GND_L01_P000" (hatched Horizontal grid 0.2 track 0.2, pour order 0): 0.762,126.619 96.52,126.619 96.52,76.835 96.393,76.708 0.762,76.708
GND on Bottom Layer "GND_L02_P001" (hatched Horizontal grid 0.2 track 0.2, pour order 1): 0.762,126.619 96.52,126.619 96.52,76.708 0.635,76.708

## Silkscreen, mask and mechanical layers (free items; w line width, h text height)
Top Overlay:
  text "Talking" at 45.339,84.888 h1.3
  text "-To-" at 46.99,82.296 h1.3
  text "Plants" at 45.847,80.137 h1.3

## Text inside footprints (layer, text, board x,y; h text height)
J3: Top Overlay "1" at 32.991,104.289 h1.02 r180; Top Overlay "2" at 33.291,101.589 h1.02 r180; Top Overlay "17" at 8.811,104.289 h1.02 r180; Top Overlay "18" at 8.763,101.092 h1.02 r180